# Altium PCB User_interface.PcbDoc
Units mm, origin at the board's own origin, x right, y up, seen from the top; angles counter-clockwise.
Board outline 23 x 15 mm, 2 copper layers (Top Layer, Bottom Layer); 29 components, 41 nets, 153 pads, 20 vias.
Unrouted connection lines stored in the file: 1.
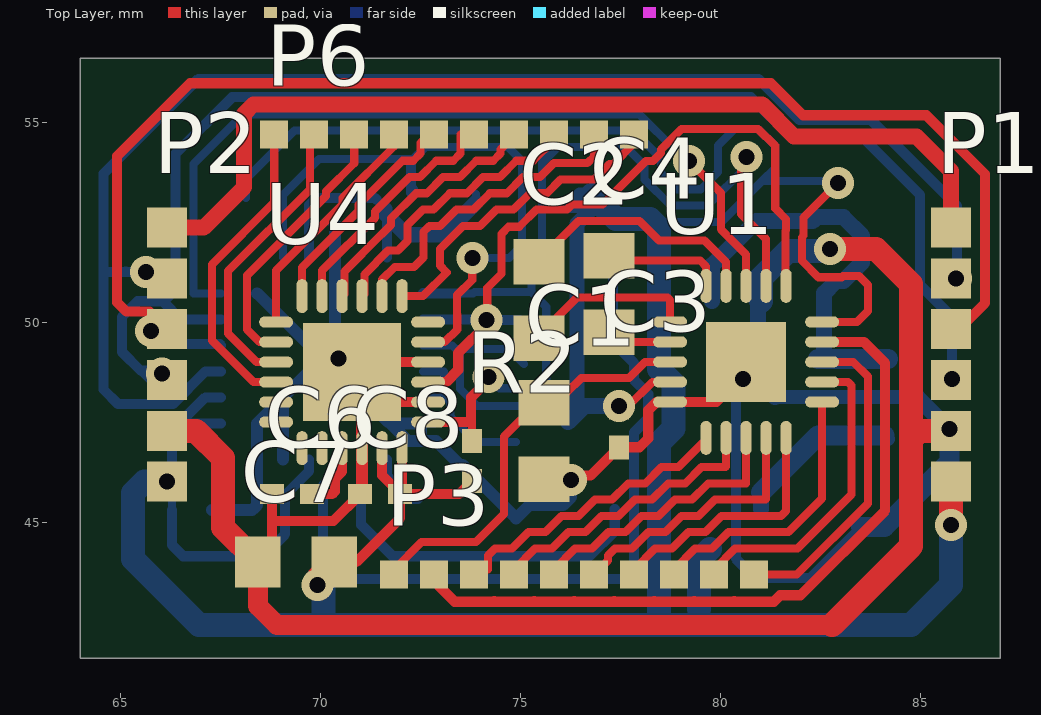
[diagram p0: Top Layer view]
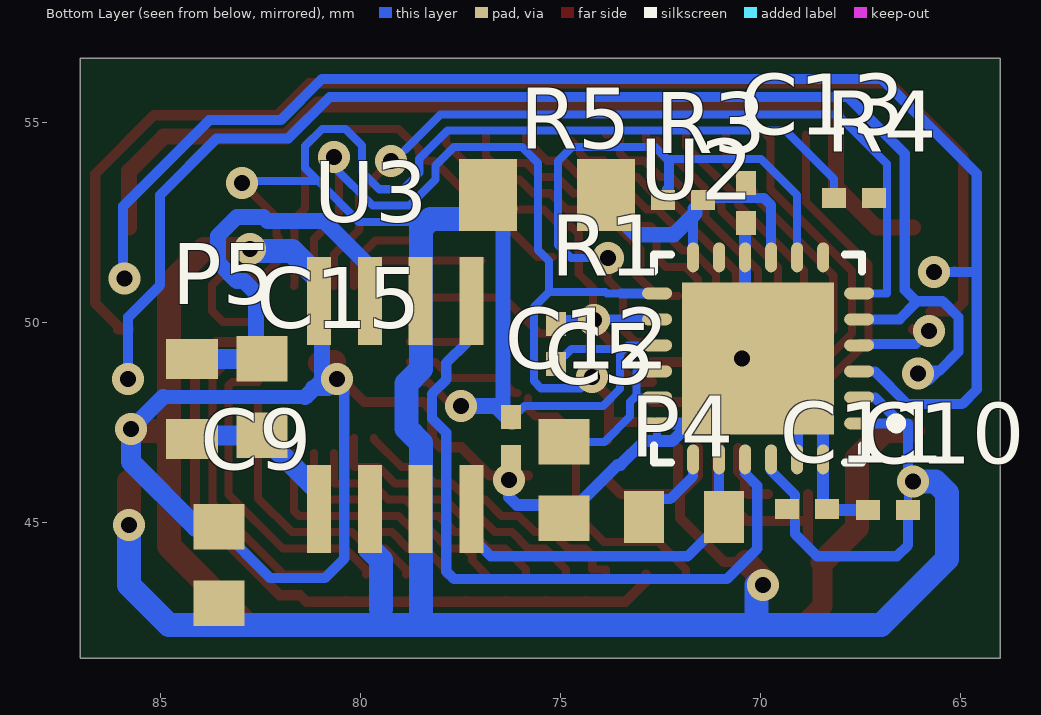
[diagram p1: Bottom Layer view, seen from below]

## Layer stack, top to bottom
Top Layer: signal copper 0.0356
Dielectric: dielectric 0.32, FR-4, Dk 4.8
Bottom Layer: signal copper 0.0356

## Board outline
64,56.6 87,56.6 87,41.6 64,41.6

## Design rules (kind name [scope] priority, off if disabled: settings)
Clearance [All] p1: gap=0.203
HoleSize [All] p1: absolutevalues=TRUE maxlimit=1 minlimit=0.3 maxpercent=80.000 minpercent=20.000
MinimumSolderMaskSliver [All] p1: minsoldermaskwidth=0
PolygonConnect [All] p1: connectstyle=Relief reliefconductorwidth=0.254 reliefentries=4 polygonreliefangle="90 Angle" airgapwidth=0.254
RoutingVias [All] p1: holewidth=0.4 width=0.8 viastyle="Through Hole" minholewidth=0.3 minwidth=0.6 maxholewidth=1 maxwidth=2
SilkToSilkClearance [All] p1: silktosilkclearance=0
SilkToSolderMaskClearance [IsPad] p1: minsilkscreentomaskgap=0 clearancetoexposedcopper=TRUE
SolderMaskExpansion [All] p1: expansion=0.102
Width [All] p1: maxlimit=1 minlimit=0.203 preferedwidth=0.254
24 further rules are at their usual default settings.

## Components (designator, comment, footprint, x,y, rotation, side; value= is the part's Value field where it differs from the comment)
C1 "10u" 0805 75.6,47.025 r90 top
C2 "10u" 0805 75.475,50.555 r90 top
C3 "Cap Semi" 0402 77.47,47.371 r90 top
C4 "10u" 0805 77.225,50.7 r90 top
C5 "10u" 0805 74.9,46.05 r90 bottom
C6 "Cap Semi" 0402 69.3,45.7 r180 top
C7 "10u" 0805 69.4,44 r0 top
C8 "Cap Semi" 0402 71.5,45.7 r0 top
C9 "10u" 0805 83.525,43.925 r270 bottom
C10 "Cap Semi" 0402 66.8,45.3 r180 bottom
C11 "Cap Semi" 0402 68.825,45.325 r0 bottom
C12 "Cap Semi" 0402 76.225,47.125 r90 bottom
C13 "Cap Semi" 0402 70.35,52.975 r90 bottom
C15 "Cap Semi" 0805 82.45,48.125 r90 bottom
P1 "OutputConn" Goldpin6_1.27mm 85.775,49.823 r0 top
P2 "InputConn" Goldpin6_1.27mm 66.175,49.823 r0 top
P3 "LED_connector" User_interface_10pin_connector 76.327,43.688 r180 top
P4 "Programming" GeckoProgramming 70.9,45.125 r0 bottom
P5 "Motor" GeckoProgramming 84.2,47.075 r90 bottom
P6 "Touch_connector" User_interface_10pin_connector 73.327,54.688 r180 top
R1 "Res2" 0402 75.1,49.45 r270 bottom
R2 "Res2" 0402 73.8,46.525 r270 top
R3 "Res2" 0402 71.925,53.05 r180 bottom
R4 "Res2" 0402 67.65,53.1 r0 bottom
R5 "Res2" 1206 75.325,53.175 r180 bottom
U1 "ADP8866" QFN20_4x4x0.5 82.55,48.006 r180 top
U2 "EFM32ZG110" QFN24_5x5_0.65 70.1,49.1 r0 bottom
U3 "BD6210" SOT8 80.225,47.925 r90 bottom
U4 "AD7147" QFN24_4x4 68.9,50 r0 top

## Footprints (in the part's own frame and the unit in brackets; to place one, negate y for a bottom-side part, rotate by r counter-clockwise, add the part's x,y. Pads: shape width x height; smd on the part's side, far side on the other; paste and mask are expansions set on the pad)
0402 [mm] "Chip Capacitor, Body 1.0x0.5mm, IPC High Density"
  rect 0.6x0.5 smd: 1(-0.5,0) 2(0.5,0)
  body extent -0.55,-0.3 0.55,0.3, height 1.3
0805 [mm]
  rect 1.14x1.27 smd: 1(-0.955,0) 2(0.955,0)
1206 [mm]
  rect 1.45x1.8 smd: 1(-1.475,0) 2(1.475,0)
GeckoProgramming [mm]
  rect 1x1.3 smd: 1(0,0) 2(2,0)
Goldpin6_1.27mm [mm]
  rect 1x1 smd: 1(0,-3.81) 2(0,-2.54) 3(0,-1.27) 4(0,0) 5(0,1.27) 6(0,2.54)
QFN20_4x4x0.5 [mm]
  rrect100% 0.85x0.28 smd: 1(0,0) 2(0,-0.5) 3(0,-1) 4(0,-1.5) 5(0,-2) 11(3.8,-2) 12(3.8,-1.5) 13(3.8,-1) 14(3.8,-0.5) 15(3.8,0)
  rrect100% 0.28x0.85 smd: 6(0.9,-2.9) 7(1.4,-2.9) 8(1.9,-2.9) 9(2.4,-2.9) 10(2.9,-2.9) 16(2.9,0.9) 17(2.4,0.9) 18(1.9,0.9) 19(1.4,0.9) 20(0.9,0.9)
  rect 2x2 smd: 21(1.9,-1)
QFN24_4x4 [mm]
  rrect100% 0.85x0.28 smd: 1(0,0) 2(0,-0.5) 3(0,-1) 4(0,-1.5) 5(0,-2) 6(0,-2.5) 13(3.8,-2.5) 14(3.8,-2) 15(3.8,-1.5) 16(3.8,-1) 17(3.8,-0.5) 18(3.8,0)
  rrect100% 0.28x0.85 smd: 7(0.65,-3.15) 8(1.15,-3.15) 9(1.65,-3.15) 10(2.15,-3.15) 11(2.65,-3.15) 12(3.15,-3.15) 19(3.15,0.65) 20(2.65,0.65) 21(2.15,0.65) 22(1.65,0.65) 23(1.15,0.65) 24(0.65,0.65)
  rect 2.45x2.45 smd: 25(1.9,-1.25)
QFN24_5x5_0.65 [mm]
  oval 0.75x0.3 smd: 1(-2.575,1.631) 2(-2.575,0.981) 3(-2.575,0.331) 4(-2.575,-0.319) 5(-2.575,-0.969) 6(-2.575,-1.619) 13(2.475,-1.619) 14(2.475,-0.969) 15(2.475,-0.319) 16(2.475,0.331) 17(2.475,0.981) 18(2.475,1.631)
  oval 0.3x0.75 smd: 7(-1.675,-2.519) 8(-1.025,-2.519) 9(-0.375,-2.519) 10(0.275,-2.519) 11(0.925,-2.519) 12(1.575,-2.519) 19(1.575,2.531) 20(0.925,2.531) 21(0.275,2.531) 22(-0.375,2.531) 23(-1.025,2.531) 24(-1.675,2.531)
  rect 3.8x3.8 smd: 25(-0.05,0.006)
  silkscreen extent -3.62,-2.59 2.55,2.61, body extent -2.63,-2.57 2.53,2.58, height 1
SOT8 [mm]
  rect 2.2x0.6 smd: 1(-2.6,0.8) 2(-2.6,-0.47) 3(-2.6,-1.74) 4(-2.6,-3.01) 5(2.6,-3.01) 6(2.6,-1.74) 7(2.6,-0.47) 8(2.6,0.8)
User_interface_10pin_connector [mm]
  rect 0.7x0.7 smd: 1(-4.525,0) 2(-3.525,0) 3(-2.525,0) 4(-1.525,0) 5(-0.525,0) 6(0.475,0) 7(1.475,0) 8(2.475,0) 9(3.475,0) 10(4.475,0)

## Part data
C1 C2 C4 C5 C7 C9: library part "Cap Semi", "Capacitor (Semiconductor SIM Model)"
C3 C6 C8 C10 C11 C12 C13 C15: "Capacitor (Semiconductor SIM Model)"
P1 P2: library part MHDR1X6, "Header, 6-Pin"
P3 P6: library part "Header 10", "Header, 10-Pin"
P4 P5: library part MHDR1X2, "Header, 2-Pin"
R1 R2 R3 R4 R5: "Resistor"

## Via types
v1: diameter 0.8, hole 0.4, Top Layer to Bottom Layer, 20 vias

## Nets (pads, with @x,y where several pads share a name; then routed paths per layer and width w, separated by ;. In a path a pad name is that pad's centre, name@x,y a point inside that pad or via, vN(x,y) a via of type N, cw(c..) or ccw(c..) an arc to the next point about the centre after c; other vN are vias at no path point)
+5V: P1.6 P2.6 | length 24
  Top Layer w0.4: P2.6 67.088,52.363 68.099,53.374 68.099,55.205 68.335,55.441 81.051,55.441 81.853,54.64 84.91,54.64 85.775,53.775 P1.6
FIN: P4.1 U2.20 U3.4 | length 9.1
  Bottom Layer w0.254: U2.20 71.025,44.933 71.813,44.145 76.735,44.145 77.365,44.775 U3.4@77.365,45.325
GND: C1.1 C3.1 C5.1 C6.2 C7.1 C8.1 C9.1 C10.1 C11.1 C12.1 C13.1 P1.2 P2.2 U1.15 U1.21 U2.10 U2.18 U2.23 U2.24 U2.25 U3.8 U4.10 U4.14 U4.16 U4.25 | length 100.1
  Top Layer w0.254: C7.1 68.8,44.355 68.8,45.027 ; C6.2 68.8,45.027 ; C8.1@71.05,45.75 C8.1 70.327,45.027 68.8,45.027 ; U4.14 71.55,48 71.05,48.5 U4.25 71.05,49 U4.16 ; C1.1@75.8,46.162 76.761,46.162 C3.1 77.986,46.871 78.205,47.09 78.205,47.795 78.416,48.006 U1.15 79.904,48.006 U1.21@80.65,48.752
  Top Layer w0.3: C8.1@71.05,45.75 U4.10 U4.25@71.05,48.5
  Top Layer w0.5: C7.1 68.445,42.905 68.922,42.428 82.803,42.428
  Top Layer w0.6: P2.2 66.892,47.283 67.575,46.6 67.575,44.87 C7.1 ; U1.21@80.656,49 80.975,49 U1.21@81,48.975 ; v1(82.75,51.825) 83.9,51.825 84.772,50.953 84.772,47.072 ; 82.803,42.428 84.772,44.397 84.772,47.072 ; P1.2 84.983,47.283 84.772,47.072
  Bottom Layer w0.203: U2.25 71.025,48.119 71.675,47.469 U2.25@71.756,47.469 ; 72.575,47.025 U2.18 U2.18@72.859,47.469
  Bottom Layer w0.254: U2.25@71.025,48.119 U2.25@71.106,48.119 ; v1(80.575,48.575) 80.395,48.395 80.395,44.088 80.883,43.6 82.245,43.6 C9.1
  Bottom Layer w0.3: C10.1 C11.1@68.3,45.3 ; C11.1 68.425,45.425 U2.24 68.425,47.469 U2.25@69.075,48.119 ; U2.25@68.425,50.719 U2.25 ; U2.23 U2.25@69.075,48.119 ; C13.1 70.375,52.45 U2.10 70.375,49.419 U2.25 ; v1(70.456,49.094) U2.25@70.131,49.094 ; U2.18 U2.25@71.756,47.469 ; v1(76.275,46.05) 76.275,45.625 76.075,45.425 75.23,45.425 C5.1 73.563,46.432 73.493,46.432 72.9,47.025 72.575,47.025 72.2,47.025 U2.25@71.756,47.469 ; U2.25@69.075,48.119 U2.25 ; U2.25 U2.25@70.131,49.094 ; U2.25@70.131,49.094 71.106,48.119 U2.25@71.756,47.469
  Bottom Layer w0.35: 81.375,48.125 84.933,48.125
  Bottom Layer w0.4: v1(80.575,48.575) 80.8,48.35 81.175,48.35 ; U3.8@80.95,51.025 80.95,48.55 81.375,48.125 ; 84.933,48.125 v1(85.733,47.325)
  Bottom Layer w0.5: C9.1 84.105,44.88 85.733,46.508 v1(85.733,47.325)
  Bottom Layer w0.6: U3.8 81.025,51.1 81.7,51.775 82.7,51.775 v1(82.75,51.825)
INT_AD7147: R3.1 U2.8 U4.17 | length 16
  Top Layer w0.203: U4.17 73.114,49.5 73.43,49.816 73.43,50.184 73.424,50.19 73.424,50.674 73.804,51.054 v1(73.804,51.603)
  Bottom Layer w0.203: U2.8 69.075,53.181 69.974,54.08 72.25,54.08 R3.1@72.25,53.225 ; 72.35,53.325 72.3,53.375 72.3,54.05 72.63,54.38 74.701,54.38 75.05,54.031 75.05,51.925 74.728,51.603 v1(73.804,51.603)
INT_AD8866: R4.1 U1.8 U2.6 | length 20.6
  Top Layer w0.203: v1(79.225,54.025) 80.02,53.23 80.02,52.32 80.65,51.69 U1.8
  Bottom Layer w0.203: U2.6 66.831,50.719 66.831,53.956 68.068,55.193 77.988,55.193 78.879,54.302
MODCONND0: P1.5 P2.5 U2.3 | length 35.6
  Top Layer w0.254: v1@65.608,51.26 P2.5@65.775,51.093
  Bottom Layer w0.254: 65.142,51.26 65.152,51.25 ; v1(65.653,51.253) 65.155,51.253 65.152,51.25 ; U2.3 67.135,48.769 66.316,47.95 64.95,47.95 64.586,48.314 64.586,51.25 ; v1(85.893,51.093) 85.925,51.125 85.925,52.9 83.775,55.05 81.986,55.05 80.954,56.082 66.957,56.082 64.586,53.711 64.586,51.25 ; 64.586,51.25 65.152,51.25
MODCONND1: P1.4 P2.4 U2.4 | length 34.4
  Top Layer w0.254: v1@65.598,49.823 P2.4 ; P2.4@65.735,50.263 65.158,50.263 64.923,50.498 64.923,54.148 66.746,55.971 81.271,55.971 82.072,55.17 85.155,55.17 86.623,53.702 86.623,50.474 86.048,49.899 86.048,49.823 P1.4
  Bottom Layer w0.254: 66.1,49.45 67.494,49.45 U2.4
  other v1: 65.778,49.777
MODCONND2: P1.3 P2.3 U2.5 | length 34.5
  Bottom Layer w0.254: v1(66.053,48.72) 65.608,48.72 65.775,48.553 65.775,48.79 65.51,48.79 65.043,49.257 65.043,50.127 65.438,50.522 66.066,50.522 ; U2.5 66.508,50.069 66.508,50.08 66.081,50.508 66.383,50.81 66.383,54.208 67.799,55.624 80.765,55.624 81.796,54.593 83.586,54.593 85,53.178 85,50.925 85.8,50.125 v1(85.8,48.575)
NetC1_2: C1.2 P3.10 U1.13 | length 10.2
  Top Layer w0.203: P3.10 71.852,43.819 72.539,44.506 73.9,44.506 74.6,45.206 74.6,47.144 75.093,47.637 75.612,47.637 75.8,47.825 C1.2@75.8,48.105 ; C1.2@76.065,48.225 76.15,48.225 76.53,48.605 77.721,48.605 78.122,49.006 U1.13
NetC2_1: C2.1 U1.11 | length 4.5
  Top Layer w0.203: C2.1@75.184,49.718 75.518,49.718 76.42,50.62 78.68,50.62 78.75,50.55 U1.11
NetC2_2: C2.2 U1.9 | length 6.4
  Top Layer w0.203: C2.2@75.184,51.628 75.562,51.628 76.464,52.53 77.986,52.53 78.476,52.04 79.614,52.04 80.15,51.504 U1.9
NetC4_1: C4.1 U1.12 | length 1.3
  Top Layer w0.203: C4.1@77.428,49.506 U1.12
NetC4_2: C4.2 U1.10 | length 3.2
  Top Layer w0.203: C4.2@76.962,51.541 79.502,51.541 79.65,51.393 U1.10
NetC5_2: C5.2 U2.16 U2.17 | length 4.2
  Bottom Layer w0.203: U2.17 73.044,48.119 73.092,48.167 ; U2.16 73.092,48.769 73.092,48.167 ; C5.2 73.895,47.005 73.266,47.634 73.266,47.637 73.255,47.648 73.255,48.005 73.092,48.167
NetC6_1: C6.1 U4.9 | length 1.8
  Top Layer w0.254: C6.1 70.3,45.7 70.37,45.77 70.37,46.087 70.55,46.267 U4.9
NetC15_1: C15.1 P5.1 U3.1 | length 4.2
  Bottom Layer w0.35: P5.1@84.105,47.17 P5.1
  Bottom Layer w0.4: U3.1 U3.1@81.025,45.745
  Bottom Layer w0.5: U3.1@81.025,45.745 C15.1 P5.1@84.105,47.17
NetC15_2: C15.2 P5.2 U3.7 | length 10.7
  Bottom Layer w0.35: P5.2@84.195,49.08 P5.2
  Bottom Layer w0.4: U3.7@79.8,50.525 79.8,51.425 80.9,52.525 82.314,52.525 82.417,52.628 83.083,52.628 83.553,52.158 83.553,51.492 83.083,51.022 82.897,51.022 82.6,50.725 82.6,49.23 C15.2
  Bottom Layer w0.5: C15.2 P5.2@84.195,49.08
NetP3_1: P3.1 U1.3 | length 8
  Top Layer w0.203: P3.1 81.915,43.688 83.693,45.466 83.693,48.641 83.328,49.006 U1.3
NetP3_2: P3.2 U1.2 | length 7.8
  Top Layer w0.203: P3.2 79.852,43.819 80.376,44.343 81.935,44.343 83.287,45.695 83.287,48.412 83.193,48.506 U1.2
NetP3_3: P3.3 U1.1 | length 7
  Top Layer w0.203: P3.3 78.852,43.819 79.376,44.343 79.801,44.343 80.207,44.749 81.706,44.749 82.55,45.593 U1.1
NetP3_4: P3.4 U1.20 | length 6
  Top Layer w0.203: P3.4 77.852,43.819 78.376,44.343 78.801,44.343 79.207,44.749 79.633,44.749 80.039,45.156 81.525,45.156 81.65,45.28 U1.20@81.65,46.725
NetP3_5: P3.5 U1.19 | length 6.3
  Top Layer w0.203: P3.5 76.852,43.693 77.197,44.038 77.197,44.164 77.376,44.343 77.801,44.343 78.207,44.749 78.633,44.749 79.039,45.156 79.464,45.156 79.871,45.562 81.132,45.562 81.15,45.58 U1.19@81.15,46.725
NetP3_6: P3.6 U1.18 | length 6.6
  Top Layer w0.203: P3.6 75.852,43.819 76.376,44.343 76.801,44.343 77.207,44.749 77.633,44.749 78.039,45.156 78.464,45.156 78.871,45.562 79.296,45.562 79.702,45.968 80.645,45.968 80.65,45.973 U1.18@80.65,46.725
NetP3_7: P3.7 U1.17 | length 7.2
  Top Layer w0.203: P3.7 74.852,43.819 75.376,44.343 75.801,44.343 76.207,44.749 76.633,44.749 77.039,45.156 77.464,45.156 77.871,45.562 78.296,45.562 78.702,45.968 79.128,45.968 79.534,46.375 80.137,46.375 80.15,46.388 U1.17
NetP3_8: P3.8 U1.16 | length 7.5
  Top Layer w0.203: P3.8 73.852,43.819 74.197,43.819 74.197,44.164 74.376,44.343 74.801,44.343 75.207,44.749 75.633,44.749 76.039,45.156 76.464,45.156 76.871,45.562 77.296,45.562 77.702,45.968 78.128,45.968 78.534,46.375 78.959,46.375 79.65,47.065 U1.16
NetP3_9: P3.9 U1.4 | length 18.2
  Top Layer w0.254: P3.9 72.852,43.521 73.365,43.008 74.339,43.008 74.352,43.021 74.365,43.008 75.339,43.008 75.352,43.021 75.365,43.008 76.339,43.008 76.352,43.021 76.365,43.008 77.339,43.008 77.352,43.021 77.365,43.008 78.339,43.008 78.352,43.021 78.365,43.008 79.339,43.008 79.352,43.021 79.365,43.008 80.339,43.008 80.352,43.021 80.365,43.008 81.339,43.008 81.501,43.17 82.008,43.17 84.125,45.287 84.125,48.971 83.59,49.506 U1.4
NetP4_2: P4.2 U2.19 | length 1.4
  Bottom Layer w0.254: U2.19 71.675,46.15 72.25,45.575 P4.2@72.45,45.575
NetP6_1: P6.1 U4.19 | length 8.2
  Top Layer w0.203: U4.19 72.57,50.65 73.165,51.245 72.995,51.414 72.995,51.826 73.576,52.408 74.002,52.408 74.408,52.814 74.833,52.814 75.24,53.22 75.665,53.22 76.013,53.569 76.848,53.569 77.237,53.957 77.335,53.957 77.852,54.475 P6.1
NetP6_2: P6.2 U4.20 | length 7.9
  Top Layer w0.203: U4.20 71.55,51.064 71.866,51.38 72.351,51.38 72.589,51.618 72.589,52.26 72.736,52.408 73.002,52.408 73.408,52.814 73.833,52.814 74.24,53.22 74.665,53.22 75.071,53.627 75.497,53.627 75.845,53.975 76.68,53.975 76.852,54.147 P6.2
NetP6_3: P6.3 U4.21 | length 7.1
  Top Layer w0.203: U4.21 71.105,50.705 71.105,51.194 71.697,51.786 71.944,51.786 72.182,52.024 72.182,52.429 72.568,52.814 72.833,52.814 73.24,53.22 73.665,53.22 74.071,53.627 74.497,53.627 74.903,54.033 75.328,54.033 75.852,54.557 P6.3
NetP6_4: P6.4 U4.22 | length 6.5
  Top Layer w0.203: U4.22 70.605,50.705 70.605,51.269 71.529,52.193 71.538,52.193 71.776,52.431 71.776,52.597 72.399,53.22 72.665,53.22 73.071,53.627 73.497,53.627 73.903,54.033 74.328,54.033 74.507,54.212 74.507,54.311 74.734,54.539 74.852,54.539 P6.4
NetP6_5: P6.5 U4.23 | length 6.2
  Top Layer w0.203: U4.23 70.05,51.288 71.37,52.608 71.37,52.765 72.231,53.627 72.497,53.627 72.903,54.033 73.328,54.033 73.507,54.212 73.507,54.688 P6.5
NetP6_6: P6.6 U4.24 | length 5.7
  Top Layer w0.203: U4.24 69.55,51.363 70.963,52.776 70.963,52.934 72.063,54.033 72.328,54.033 72.507,54.212 72.507,54.477 72.566,54.537 72.832,54.537 72.852,54.557 P6.6
NetP6_7: P6.7 U4.1 | length 5.9
  Top Layer w0.203: U4.1 68.9,51.288 70.557,52.945 70.557,53.102 71.852,54.397 P6.7
NetP6_8: P6.8 U4.2 | length 6.8
  Top Layer w0.203: U4.2 68.486,49.5 68.17,49.816 68.17,51.17 70.15,53.15 70.15,53.27 70.852,53.972 P6.8
NetP6_9: P6.9 U4.3 | length 7.4
  Top Layer w0.203: U4.3 68.411,49 67.7,49.711 67.7,51.275 69.744,53.319 69.744,54.58 P6.9
NetP6_10: P6.10 U4.4 | length 7.8
  Top Layer w0.203: P6.10 68.852,53.001 67.294,51.443 67.294,49.543 68.336,48.5 U4.4
RIN: U2.21 U3.5 | length 18.3
  Bottom Layer w0.254: U2.21 70.375,46.217 70.07,45.912 70.07,44.338 70.833,43.575 77.65,43.575 77.845,43.77 77.845,44.088 77.845,46.562 77.845,47.237 78.205,47.598 78.205,48.202 77.845,48.563 77.845,48.98 77.325,49.5 U3.5@77.325,51.075
SCL: R1.1 U1.6 U2.14 U4.15 | length 19.2
  Top Layer w0.203: v1@74.178,50.052 74.178,50.853 74.535,51.21 74.535,52.206 74.714,52.385 74.979,52.385 75.408,52.814 76.173,52.814 76.295,52.936 77.061,52.936 78.15,54.025 78.32,54.025 78.52,54.225 78.52,54.317 79.036,54.832 80.946,54.832 81.38,54.399 81.38,52.842 81.65,52.572 81.65,52.296 81.639,52.285 81.639,50.917 U1.6
  Top Layer w0.254: U4.15 73.15,48.5 73.455,48.805 73.455,49.231 v1@74.178,49.953
  Bottom Layer w0.254: U2.14 v1@74.154,50.069 ; v1@74.154,49.977 v1(74.154,50.052) v1@74.254,50.052 ; v1@74.154,50.152 v1@74.254,50.052 ; R1.1 74.998,50.052 v1@74.254,50.052
SDA: R2.1 U1.7 U2.13 U4.13 | length 24.1
  Top Layer w0.203: 73.775,48.125 73.8,48.1 R2.1 ; U1.7 81.15,52.075 80.525,52.7 80.525,54.125 80.528,54.128 v1(80.654,54.128) ; v1(80.654,54.128) 80.654,54.311 80.675,54.311 80.675,54.149 v1(80.654,54.128)
  Top Layer w0.254: U4.13 73.75,47.5 73.775,47.525 73.775,48.125 v1@74.025,48.375
  Bottom Layer w0.203: 73.475,50.719 73.823,50.719 73.862,50.757 74.686,50.757 74.679,50.75 75.281,50.75 ; v1(74.204,48.627) 74.486,48.345 75.476,48.345 75.655,48.524 75.655,50.376 75.281,50.75 ; v1@80.525,54.125 80.528,54.128 v1(80.654,54.128) 80.654,53.882 79.685,52.914 78.765,52.914 78.114,53.565 78.114,53.917 77.651,54.38 75.949,54.38 75.55,53.981 75.55,51.8 75.281,51.531 75.281,50.75
  Bottom Layer w0.254: U2.13@72.578,50.722 U2.13 73.475,50.719
VCC: C3.2 C7.2 C8.2 C9.2 C10.2 C11.2 C12.2 C13.2 P1.1 P2.1 R1.2 R2.2 R3.2 R4.2 R5.1 R5.2 U1.5 U1.14 U2.1 U2.2 U2.9 U2.12 U2.15 U2.22 U3.2 U3.3 U3.6 U4.11 U4.12 | length 115.2
  Top Layer w0.203: C3.2@77.671,47.871 78.306,48.506 U1.14 ; U1.5 82.556,50 83.425,50 83.7,50.275 83.7,50.925 83.473,51.152 83.073,51.152 83.042,51.12 82.458,51.12 82.045,51.533 82.045,52.117 82.089,52.161 82.089,52.614 v1(82.95,53.475)
  Top Layer w0.254: C7.2 70.9,44 72,45.1 C8.2 ; U4.11 71.55,46.167 72,45.717 C8.2 ; U4.12 72.05,45.75 C8.2 ; R2.2 73.475,45.7 C8.2 ; C3.2@77.453,47.871 C3.2
  Top Layer w0.6: v1(69.928,43.427) 69.928,43.573 C7.2 ; v1(85.775,44.925) P1.1
  Bottom Layer w0.203: v1(66.175,46.013) 66.3,45.888 C10.2 ; R4.2 68.15,53.575 69.361,54.786 77.82,54.786 78.52,54.086 78.52,53.733 78.933,53.32 79.517,53.32 79.949,53.752 79.949,54.42 80.362,54.832 80.946,54.832 81.38,54.399 81.38,53.857 81.048,53.525 ; U2.15 73.304,49.419 73.39,49.332 ; 73.481,49.241 73.45,49.273 ; R5.2@73.895,52.995 R5.2@73.895,53.2 ; R1.2 74.718,49.332 73.39,49.332 ; C12.2@76.175,47.625 75.895,47.905 73.929,47.905 73.499,48.335 73.499,49.224 73.45,49.273 ; R5.1@76.5,53.175 76.16,52.835 76.8,52.835 77.14,52.835 77.468,52.507 80.03,52.507 81.048,53.525 ; v1(82.95,53.475) 82.9,53.525 81.048,53.525 ; 73.39,49.332 73.45,49.273
  Bottom Layer w0.254: C10.2 66.3,44.425 66.58,44.145 68.57,44.145 69.125,44.7 69.125,45.679 69.725,46.279 U2.22 ; v1@66.3,45.888 66.3,47.469 ; U2.1 66.3,47.469 ; U2.2 67.132,48.119 66.482,47.469 66.3,47.469 ; U2.9 69.725,52.925 69.905,53.105 71.37,53.105 R3.2 ; U2.12 71.675,52.668
  Bottom Layer w0.381: R3.2@71.625,52.825 71.625,52.718 71.675,52.668 72.162,52.181 73.088,52.181 73.895,52.988 R5.2@73.895,52.995 ; C12.2@76.2,47.5 76.425,47.725 76.425,52.46 76.8,52.835 R5.1 R5.1@76.5,53.175
  Bottom Layer w0.4: C12.2@76.2,47.5 76.6,47.9 v1(77.475,47.9)
  Bottom Layer w0.6: v1(66.175,46.013) 65.613,46.013 65.325,45.725 65.325,44.075 66.975,42.425 70.09,42.425 70.09,43.427 v1(69.928,43.427) ; 70.125,42.425 84.775,42.425 85.775,43.425 v1(85.775,44.925) ; R5.1 77.14,52.835 77.397,52.578 78.245,52.578 78.475,52.348 78.475,48.824 78.835,48.463 78.835,47.337 78.475,46.976 78.475,46.823 ; 78.475,42.425 78.475,43.827 ; 78.475,43.827 78.475,46.823 ; 79.475,42.825 79.475,44.05 U3.2@79.75,44.325
pads on no net: U2.7 U2.11 U4.5 U4.6 U4.7 U4.8 U4.18